# EAGLE board IOT261_HumanDetection_TshiamoMosweu (EAGLE 9.7.0)

Size 196.92 x 123.09 mm. Coordinates in mm from the lower left corner, seen from the top.
Outline: 0,0 196.92,0 196.92,123.09 0,123.09 0,0
Copper layers (1*16): Top 0.035mm / dielectric 1.5mm / Bottom 0.035mm
Design rules "default": minimum track width 6mil, minimum drill 0.35mm, track to track 6mil, track to pad 6mil, pad to pad 6mil, via to via 6mil, smd to smd 6mil, copper to edge 40mil, drill to drill 6mil, minimum pad ring 10mil, minimum via ring 8mil, stop-mask expansion 4mil, vias tented up to drill 0mil, thermal gap 10mil

## Footprints (pad centres in the part's own frame; a part is rotated, then mirrored left to right if it is on the bottom)
LEDRD254W60D565H860B = drill 0.981 pad 1.581: 1 -1.27,0; 2 1.27,0
PIEZO = drill 1 pad 1.6: 1 -3.5,0; 2 3.5,0
28027 = drill 1.016 long: 1 -2.54,0; 2 0,0; 3 2.54,0
RESAD1016W63L850D250B = drill 0.83 pad 1.43: 1 -5.08,0; 2 5.08,0
SWITCH-MOMENTARY-PTH-6.5MM = drill 1.016 pad 1.88: 1 -3.251,2.261; 2 3.251,2.261; 3 -3.251,-2.261; 4 3.251,-2.261
LCD-I2C = drill 1.016 long: 1 -19.05,-5.08; 2 -19.05,-7.62; 3 -19.05,-10.16; 4 -19.05,-12.7
ARDUINO-UNO-R3-SHIELD = drill 1.016 pad 1.88: 3.3V 24.13,-2.54; 5V 24.13,0; A0 24.13,12.7; A1 24.13,15.24; A2 24.13,17.78; A3 24.13,20.32; A4 24.13,22.86; A5 24.13,25.4; AREF -24.13,-13.97; D2 -24.13,20.32; D3 -24.13,17.78; D4 -24.13,15.24; D5 -24.13,12.7; D6 -24.13,10.16; D7 -24.13,7.62; D8 -24.13,3.81; D9 -24.13,1.27; D10 -24.13,-1.27; D11 -24.13,-3.81; D12 -24.13,-6.35; D13 -24.13,-8.89; GND@0 24.13,2.54; GND@1 24.13,5.08; GND@2 -24.13,-11.43; IOREF 24.13,-7.62; NC 24.13,-10.16; RES 24.13,-5.08; RX -24.13,25.4; SCL -24.13,-19.05; SDA -24.13,-16.51; TX -24.13,22.86; VIN 24.13,7.62

## Placement (x,y rotation side)
D1  RED  [LEDRD254W60D565H860B]  136.85,31.75 0 top
PIEZO1  PIEZO  [PIEZO]  113.99,49.53 180 top
PIR1  PIR-SENSOR_28027  [28027]  135.58,6.35 180 top
R1  220  [RESAD1016W63L850D250B]  138.12,39.37 90 top
R2  10k  [RESAD1016W63L850D250B]  155.9,39.37 90 top
S1  SWITCH_MOMENTARY  [SWITCH-MOMENTARY-PTH-6.5MM]  153.36,27.94 90 top
U1  LCD-16X2-I2CSUNFOUNDER-IIC  [LCD-I2C]  141.3,115.54 0 top
U2  ARDUINO-UNO-R3-SHIELD  [ARDUINO-UNO-R3-SHIELD]  47.88,38.64 270 top

## Library data of the parts
D1 = Tinkercad; CATEGORY: Opto-Electronic; SUB-CATEGORY: LED; VALUE: LED_RED
PIEZO1 PIR1 R1 R2 S1 U1 U2 = Tinkercad

## Nets
U2_5V: D1.1 PIR1.2 R2.1 S1.3 S1.4 U1.2 U2.5V U2.D8
U2_A4: U1.3 U2.A4
U2_A5: U1.4 U2.A5
U2_D2: D1.2 PIR1.1 R1.1 U2.D2
U2_D3: S1.1 S1.2 U2.D3
U2_D7: PIEZO1.1 U2.D7
U2_GND: PIEZO1.2 PIR1.3 R1.2 R2.2 U1.1 U2.GND@0 U2.GND@1 U2.GND@2

## Tracks (layer width: path | path; a pad name or v marks a point on that pad's centre or on a via)
U2_5V  (7 unrouted)
U2_A4  (1 unrouted)
U2_A5  (1 unrouted)
U2_D2  (3 unrouted)
U2_D3  (2 unrouted)
U2_D7  (1 unrouted)
U2_GND  (7 unrouted)